# Altium PCB WBL_PCB.PcbDoc
Units mm, origin at the board's own origin, x right, y up, seen from the top; angles counter-clockwise.
Board outline 152.4 x 101.6 mm, 2 copper layers (Top Layer, Bottom Layer); 20 components, 18 nets, 68 pads, 7 vias.
Unrouted connection lines stored in the file: 11.
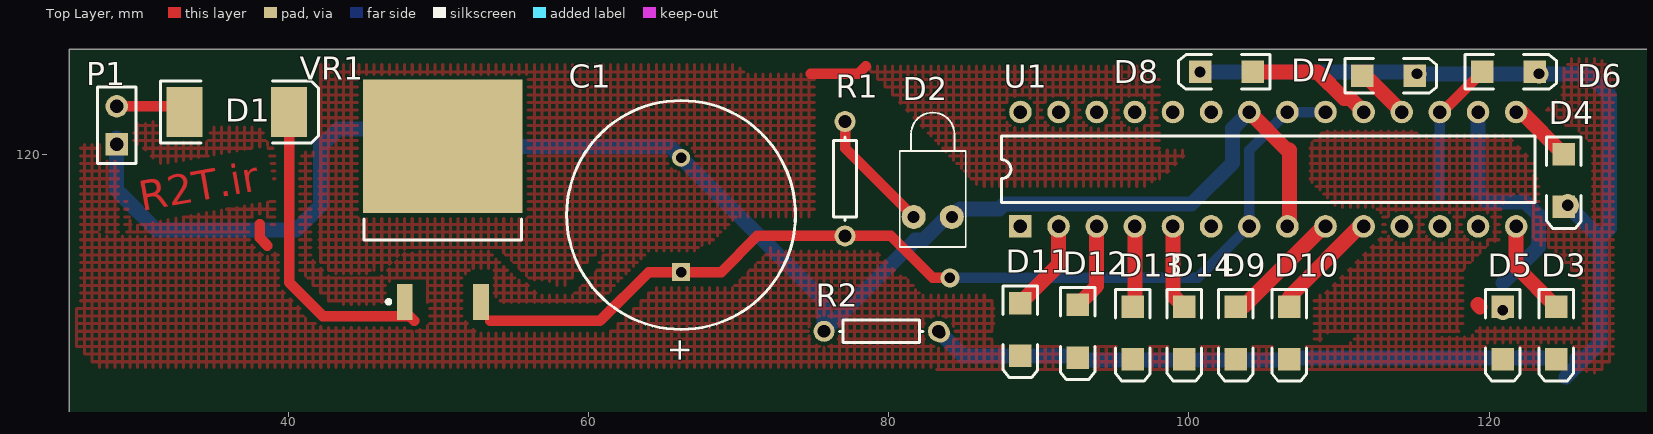
[diagram p0: Top Layer view]
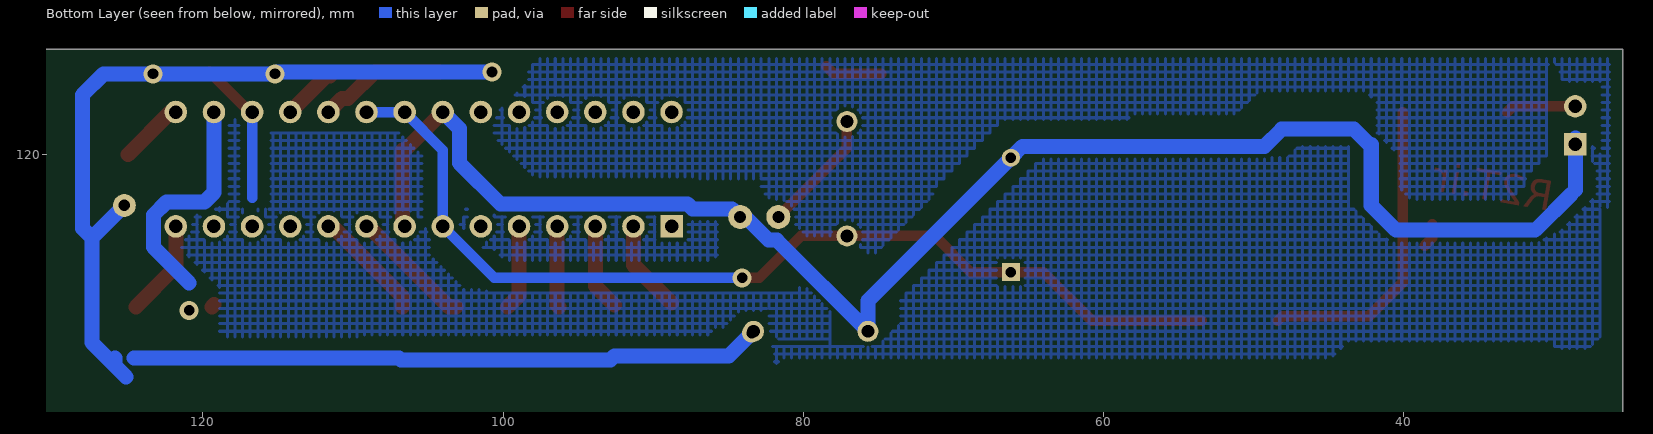
[diagram p1: Bottom Layer view, seen from below]

## Layer stack, top to bottom
Top Solder: solder mask 0.0102, Solder Resist, Dk 3.5
Top Layer: signal copper 0.0356
Dielectric 1: dielectric 0.32, FR-4, Dk 4.8
Bottom Layer: signal copper 0.0356
Bottom Solder: solder mask 0.0102, Solder Resist, Dk 3.5

## Board outline
25.4,25.4 177.8,25.4 177.8,127 25.4,127

## Design rules (kind name [scope] priority, off if disabled: settings)
Clearance [All] p1: gap=0.254
PolygonConnect [All] p1: connectstyle=Relief reliefconductorwidth=0.254 reliefentries=4 polygonreliefangle="90 Angle" airgapwidth=0.254
RoutingVias [All] p1: holewidth=0.711 width=1.27 viastyle="Through Hole" minholewidth=0.711 minwidth=1.27 maxholewidth=0.711 maxwidth=1.27
SolderMaskExpansion [All] p1: expansion=0.102
Width [All] p1: maxlimit=2 minlimit=0.7 preferedwidth=0.5
29 further rules are at their usual default settings.

## Components (designator, comment, footprint, x,y, rotation, side; value= is the part's Value field where it differs from the comment)
C1 "Cap Pol1" RB7.6-15 66.167,115.951 r270 top
D1 "Diode" SMC 36.576,122.809 r0 top
D2 "LED1" LED-1 82.931,115.824 r90 top
D3 "LED2" 3.2X1.6X1.1 124.46,108.077 r270 top
D4 "LED2" 3.2X1.6X1.1 124.968,118.237 r270 top
D5 "LED2" 3.2X1.6X1.1 120.904,108.077 r270 top
D6 "LED2" 3.2X1.6X1.1 121.285,125.476 r0 top
D7 "LED2" 3.2X1.6X1.1 113.284,125.222 r0 top
D8 "LED2" 3.2X1.6X1.1 102.489,125.476 r180 top
D9 "LED2" 3.2X1.6X1.1 103.124,108.077 r270 top
D10 "LED2" 3.2X1.6X1.1 106.68,108.077 r270 top
D11 "LED2" 3.2X1.6X1.1 88.773,108.331 r270 top
D12 "LED2" 3.2X1.6X1.1 92.583,108.204 r270 top
D13 "LED2" 3.2X1.6X1.1 96.266,108.077 r270 top
D14 "LED2" 3.2X1.6X1.1 99.695,108.077 r270 top
P1 "Header 2" HDR1X2 28.575,120.65 r90 top
R1 "Res1" AXIAL-0.3 77.089,118.364 r270 top
R2 "Res1" AXIAL-0.3 79.502,108.204 r0 top
U1 "ATmega8-16PC" 28P3 105.283,118.999 r0 top
VR1 "Volt Reg" D2PAK_N 50.292,116.967 r90 top

## Footprints (in the part's own frame and the unit in brackets; to place one, negate y for a bottom-side part, rotate by r counter-clockwise, add the part's x,y. Pads: shape width x height; smd on the part's side, far side on the other; paste and mask are expansions set on the pad)
3.2X1.6X1.1 [mm] "SMT LED; 2 Flat Leads"
  rect 1.5x1.5 smd: 1(-1.75,0) 2(1.75,0)
  silkscreen extent -2.9,-1.15 3.2,1.15
28P3 [mm] "DIP; 28 Leads; Row Spacing 7.62 mm; Pitch 2.54 mm"
  rect 1.5x1.5 hole 0.9: 1(-16.51,-3.81)
  round 1.5 hole 0.9: 2(-13.97,-3.81) 3(-11.43,-3.81) 4(-8.89,-3.81) 5(-6.35,-3.81) 6(-3.81,-3.81) 7(-1.27,-3.81) 8(1.27,-3.81) 9(3.81,-3.81) 10(6.35,-3.81) 11(8.89,-3.81) 12(11.43,-3.81) 13(13.97,-3.81) 14(16.51,-3.81) 15(16.51,3.81) 16(13.97,3.81) 17(11.43,3.81) 18(8.89,3.81) 19(6.35,3.81) 20(3.81,3.81) 21(1.27,3.81) 22(-1.27,3.81) 23(-3.81,3.81) 24(-6.35,3.81) 25(-8.89,3.81) 26(-11.43,3.81) 27(-13.97,3.81) 28(-16.51,3.81)
  silkscreen extent -17.78,-2.23 17.78,2.23
AXIAL-0.3 [mm] "Axial Device, Thru-Hole; 2 Leads; 0.3 in Pin Spacing"
  round 1.4 hole 0.85: 1(-3.81,0) 2(3.81,0)
  silkscreen extent -2.77,-0.76 2.77,0.76
D2PAK_N [mm] "D2-PAK, 4-Leads, Body 8.8x10.4mm, Pitch 2.54mm, Lead Span 15.1mm, IPC Medium Density"
  rect 2.4x1.05 smd: 1(-6.8,2.54) 3(-6.8,-2.54)
  rect 8.9x10.65 smd: 2(3.55,0)
  silkscreen extent -6.92,-5.25 -1.3,5.25, body extent -2.7,-5.28 6.3,5.28, height 4.69
HDR1X2 [mm] "Connector; Header; 2 Position"
  rect 1.5x1.5 hole 0.9: 1(0,0)
  round 1.5 hole 0.9: 2(2.54,0)
  silkscreen extent -1.27,-1.27 3.81,1.27
LED-1 [mm] "LED; 2 Leads"
  round 1.6 hole 0.8: 1(0,1.27) 2(0,-1.27)
  silkscreen extent -2,-2.2 6.95,2.2
RB7.6-15 [mm] "Polarized Capacitor (Radial); 2 Leads"
  rect 1.2x1.2 hole 0.7: 1(3.81,0)
  round 1.2 hole 0.7: 2(-3.81,0)
  silkscreen extent -7.62,-7.62 7.62,7.62
SMC [mm] "DO-214-AB/SMC; 2 C-Bend Leads; Body 7.9 x 5.9 mm, inc. leads (LxW)"
  rect 2.4x3.3 smd: 1(-3.475,0) 2(3.475,0)
  silkscreen extent -5.07,-2.05 5.43,2.05

## Part data
C1: "Polarized Capacitor (Radial)"
D1: "Default Diode"
D2: "Typical RED GaAs LED"
D3 D4 D5 D6 D7 D8 D9 D10 D11 D12 D13 D14: "Typical RED, GREEN, YELLOW, AMBER GaAs LED"
P1: "Header, 2-Pin"
R1 R2: "Resistor"
U1: "8-Bit AVR Microcontroller with 8K Bytes of In-System Programmable Flash Memory"
VR1: "Voltage Regulator"

## Free pads (board coordinates)
  round 1.524 hole 0.762: 0(125.222,116.586)

## Via types
v1: diameter 1.27, hole 0.711, Top Layer to Bottom Layer, 7 vias

## Nets (pads, with @x,y where several pads share a name; then routed paths per layer and width w, separated by ;. In a path a pad name is that pad's centre, name@x,y a point inside that pad or via, vN(x,y) a via of type N, cw(c..) or ccw(c..) an arc to the next point about the centre after c; other vN are vias at no path point)
GND: C1.2 D2.2 P1.1 R2.1 U1.8 U1.22 VR1.2 | length 107.8
  Top Layer w1: v1(104.013,122.809) 106.553,120.269 106.68,120.269 106.68,115.316 U1.8
  Bottom Layer w1: 28.575,117.602 P1.1 P1.1@28.575,121.063 ; 28.829,117.348 31.242,114.935 40.513,114.935 42.164,116.586 42.164,120.65 42.291,120.65 43.307,121.666 48.133,121.666 49.276,120.523 65.405,120.523 C1.2 75.692,110.236 R2.1 81.758,114.27 82.305,114.27 83.859,115.824 D2.2 84.735,116.358 87.376,116.358 87.711,116.693 100.183,116.693 102.909,119.419 102.909,121.705 v1(104.013,122.809)
NetD1_1: D1.1 P1.2 | length 4.7
  Top Layer w0.7: P1.2 32.72,123.19 D1.1
NetD1_2: D1.2 VR1.1 | length 20.7
  Top Layer w0.7: D1.2 40.051,111.46 42.291,109.22 48.064,109.22 48.387,108.897
NetD2_1: D2.1 R1.1 | length 8.2
  Top Layer w0.7: R1.1 77.089,120.396 D2.1
NetD3_1: D3.1 U1.14 | length 6.6
  Top Layer w1: U1.14@121.793,115.316 121.793,112.494 D3.1
NetD3_2: D3.2 D4.2 D5.2 D6.2 D7.2 D8.2 D9.2 D10.2 D11.2 D12.2 D13.2 D14.2 pad.0 R2.2 | length 52.5
  Bottom Layer w1: v1(100.739,125.476) 115.062,125.476 v1(115.189,125.349) v1(123.317,125.349) 126.619,125.349 128.016,123.952 128.016,115.062 127.381,114.427 ; pad.0 127.381,114.427 ; 125.841,106.426 125.841,105.907 125.106,105.172 125.111,105.172 127.381,107.442 127.381,114.427
NetD4_1: D4.1 U1.15 | length 4.3
  Top Layer w1: U1.15 122.146,122.809 D4.1
NetD5_1: D5.1 U1.16 | length 15.7
  Bottom Layer w1: U1.16@119.253,122.936 119.253,117.443 119.876,116.82 122.416,116.82 123.297,115.939 123.297,113.812 120.904,111.419
  other v1: 120.904,109.601
NetD6_1: D6.1 U1.17 | length 9.6
  Top Layer w0.7: U1.17 116.868,122.809 D6.1
  Bottom Layer w0.7: 116.713,117.104 U1.17
NetD7_1: D7.1 U1.18 | length 3.6
  Top Layer w1: D7.1 111.76,125.222 U1.18
NetD8_1: D8.1 U1.19 | length 8.8
  Top Layer w1: D8.1 108.553,125.476 110.311,123.718 110.724,123.718 U1.19 U1.19@111.381,122.809
NetD9_1: D9.1 U1.9 | length 8.2
  Top Layer w1: D9.1 103.604,109.827 U1.9@109.093,115.316
NetD10_1: D10.1 U1.10 | length 7.8
  Top Layer w1: D10.1 106.68,110.49 111.633,115.443 U1.10@111.633,115.316
NetD11_1: D11.1 U1.2 | length 6.3
  Top Layer w1: D11.1 91.313,112.621 U1.2@91.313,115.316
NetD12_1: D12.1 U1.3 | length 5.9
  Top Layer w1: D12.1 93.853,111.224 U1.3@93.853,115.316
NetD13_1: D13.1 U1.4 | length 5.5
  Top Layer w1: D13.1 96.393,109.954 U1.4@96.393,115.316
NetD14_1: D14.1 U1.5 | length 5.8
  Top Layer w1: U1.5@98.933,115.316 98.933,110.589 D14.1
VCC: C1.1 R1.2 U1.7 U1.20 U1.21 VR1.3 | length 66.7
  Top Layer w0.7: 53.467,108.897 60.764,108.897 64.008,112.141 C1.1 68.834,112.141 71.247,114.554 R1.2 80.137,114.554 82.931,111.76 v1(84.074,111.76)
  Bottom Layer w0.7: v1(84.074,111.76) 100.584,111.76 U1.7 104.013,120.269 U1.21 U1.20
pads on no net: U1.1 U1.6 U1.11 U1.12 U1.13 U1.23 U1.24 U1.25 U1.26 U1.27 U1.28
copper on no net: | length 47.6
  Top Layer w0.7: 38.1,115.316 38.1,114.423 38.608,113.915 ; 74.803,125.349 77.956,125.349 78.464,125.857
  Top Layer w1: 119.253,109.974 119.4,109.827
  Bottom Layer w1: v1(83.439,108.077) 84.963,106.553 88.9,106.553 92.583,106.553 92.837,106.299 96.266,106.299 99.822,106.299 102.997,106.299 106.807,106.299 106.934,106.426 110.363,106.426 124.587,106.426

## Polygon pours and split planes (outlines as drawn)
no net on Top Layer "Top Layer-No Net" (hatched 90Degree grid 0.508 track 0.203, pour order 12): 28.575,120.65 29.972,122.047 30.607,122.047 30.734,122.174 30.988,122.174 31.369,121.793 31.369,120.777 32.639,120.777 32.766,120.904 34.417,120.904 34.798,121.285 34.798,121.92 34.925,121.793 37.973,121.793 38.862,120.904 38.862,120.523 39.116,120.269 39.116,115.062 38.862,115.316 38.1,115.316 37.394,114.61 37.394,114.554 37.14,114.808 29.21,114.808 29.083,114.935 29.083,115.697 29.083,119.126 29.337,119.126 29.591,118.872 29.591,115.824 30.099,115.316 30.861,115.316 32.639,117.094 38.481,117.094 38.608,117.221 38.608,119.507 38.354,119.761 34.29,119.761 33.909,119.38 31.369,119.38 30.099,120.65 28.575,120.65
no net on Top Layer "Top Layer-No Net" (hatched 90Degree grid 0.508 track 0.203, pour order 11): 78.464,125.857 97.26,125.857 98.022,125.095 98.022,120.142 98.149,120.269 100.054,120.269 98.149,118.364 97.768,118.364 97.26,117.856 85.957,117.856
no net on Top Layer "Top Layer-No Net" (hatched 90Degree grid 0.508 track 0.203, pour order 9): 43.307,125.73 43.561,125.984 69.85,125.984 70.485,125.349 74.803,125.349 75.057,125.095 75.057,115.824 69.85,115.824 67.945,113.919 67.437,113.919 67.056,113.538 60.706,113.538 58.42,111.252 57.658,111.252 57.277,111.633 56.134,111.633 54.229,113.538 53.975,113.792 47.879,113.792 46.355,112.268 45.466,112.268 45.212,112.014 42.926,112.014 42.164,112.776 42.164,113.411 42.037,113.538 42.037,119.126 42.164,119.253 42.164,125.984 43.307,125.984
no net on Top Layer "Top Layer-No Net" (hatched 90Degree grid 0.508 track 0.203, pour order 19): 153 vertices, not listed, extent 25.908,105.41 128.397,126.492
no net on Top Layer "Top Layer-No Net" (hatched 90Degree grid 0.508 track 0.203, pour order 25): 108.839,117.475 109.855,116.459 110.109,116.459 112.395,116.459 112.903,115.951 112.903,114.554 108.966,110.617 108.712,110.617 108.331,110.236 108.331,107.188 109.347,108.204 117.983,108.204 118.237,108.458 118.237,112.268 120.142,114.173 120.523,114.173 120.777,114.427 120.777,116.586 121.412,117.221 121.793,117.221 121.539,117.475 109.22,117.475
no net on Bottom Layer "Top Layer-No Net" (hatched 90Degree grid 0.508 track 0.203, pour order 15): 29.972,126.365 30.48,125.857 30.48,119.888 31.877,118.491 31.877,117.983 32.893,116.967 39.497,116.967 40.259,117.729 40.259,119.888 41.783,121.412 41.783,123.444 42.545,124.206 49.657,124.206 51.181,122.682 51.181,122.555 51.308,122.682 58.039,122.682 58.42,122.301 66.675,122.301 71.374,117.602 71.374,117.221 75.184,113.411 75.819,113.411 76.962,114.554 79.756,114.554 82.804,117.602 82.804,118.491 82.931,118.364 86.868,118.364 86.995,118.491 97.917,118.491 100.584,121.158 100.584,122.555 98.298,124.841 98.298,125.73 97.663,126.365 43.561,126.365
no net on Bottom Layer "Top Layer-No Net" (hatched 90Degree grid 0.508 track 0.203, pour order 13): 27.305,117.094 29.718,114.681 29.972,114.681 30.226,114.427 40.64,114.427 40.894,114.681 41.656,114.681 43.688,116.713 43.688,120.523 46.99,120.523 47.752,119.761 64.135,119.761 73.533,110.363 73.533,108.712 75.057,107.188 82.042,107.188 81.915,107.061 81.915,105.918 81.407,106.426 44.831,106.426 43.688,107.569 30.353,107.569 29.845,107.061 27.686,107.061 26.924,107.823 26.924,116.332
no net on Bottom Layer "Top Layer-No Net" (hatched 90Degree grid 0.508 track 0.203, pour order 21): 30.099,126.238 29.591,125.73 29.591,125.095 29.337,124.841 26.924,124.841 26.797,124.714 26.797,119.888 27.559,120.65 28.575,120.65 27.114,119.189 27.114,116.713 26.86,116.459 26.035,116.459 26.289,116.713 26.289,126.365 30.226,126.365
no net on Bottom Layer "Top Layer-No Net" (hatched 90Degree grid 0.508 track 0.203, pour order 27): 85.852,116.358 85.725,116.231 85.725,113.284 86.106,112.903 99.822,112.903 100.711,113.792 101.346,113.792 102.997,115.443 102.489,115.951 102.489,116.459 102.108,116.078 99.949,116.078 99.669,116.358 85.979,116.358
no net on Bottom Layer "Top Layer-No Net" (hatched 90Degree grid 0.508 track 0.203, pour order 29): 78.725,111.237 78.232,110.744 78.232,107.188 78.74,107.696 81.661,107.696 82.296,108.331 82.296,109.855 82.55,109.601 84.201,109.601 85.344,108.458 85.852,108.458 86.36,107.95 109.22,107.95 109.347,107.823 118.872,107.823 118.872,111.125 121.412,113.665 121.412,114.046 120.904,114.554 120.904,115.443 119.888,116.459 118.618,116.459 118.237,116.84 118.237,122.301 117.729,122.301 117.602,122.174 117.602,116.205 117.475,116.332 115.57,116.332 115.443,116.459 115.443,121.539 115.316,121.412 106.934,121.412 105.41,119.888 105.41,115.316 104.902,114.808 104.902,113.284 102.616,110.998 101.219,110.998 100.965,110.744 80.645,110.744 80.152,111.237 78.725,111.237

## Other copper
Top Layer:
  text "R2T.ir" at 30.226,116.205 h2 r10

## Text inside footprints (layer, text, board x,y; h text height)
C1: Top Overlay "+" at 65.43,107.819 h1.5 r270